# Altium PCB CBpcisionamento.PcbDoc
Units mm, origin at the board's own origin, x right, y up, seen from the top; angles counter-clockwise.
Board outline 96.12 x 102.87 mm, 2 copper layers (Top Layer, Bottom Layer); 6 components, 0 nets, 88 pads, 0 vias.
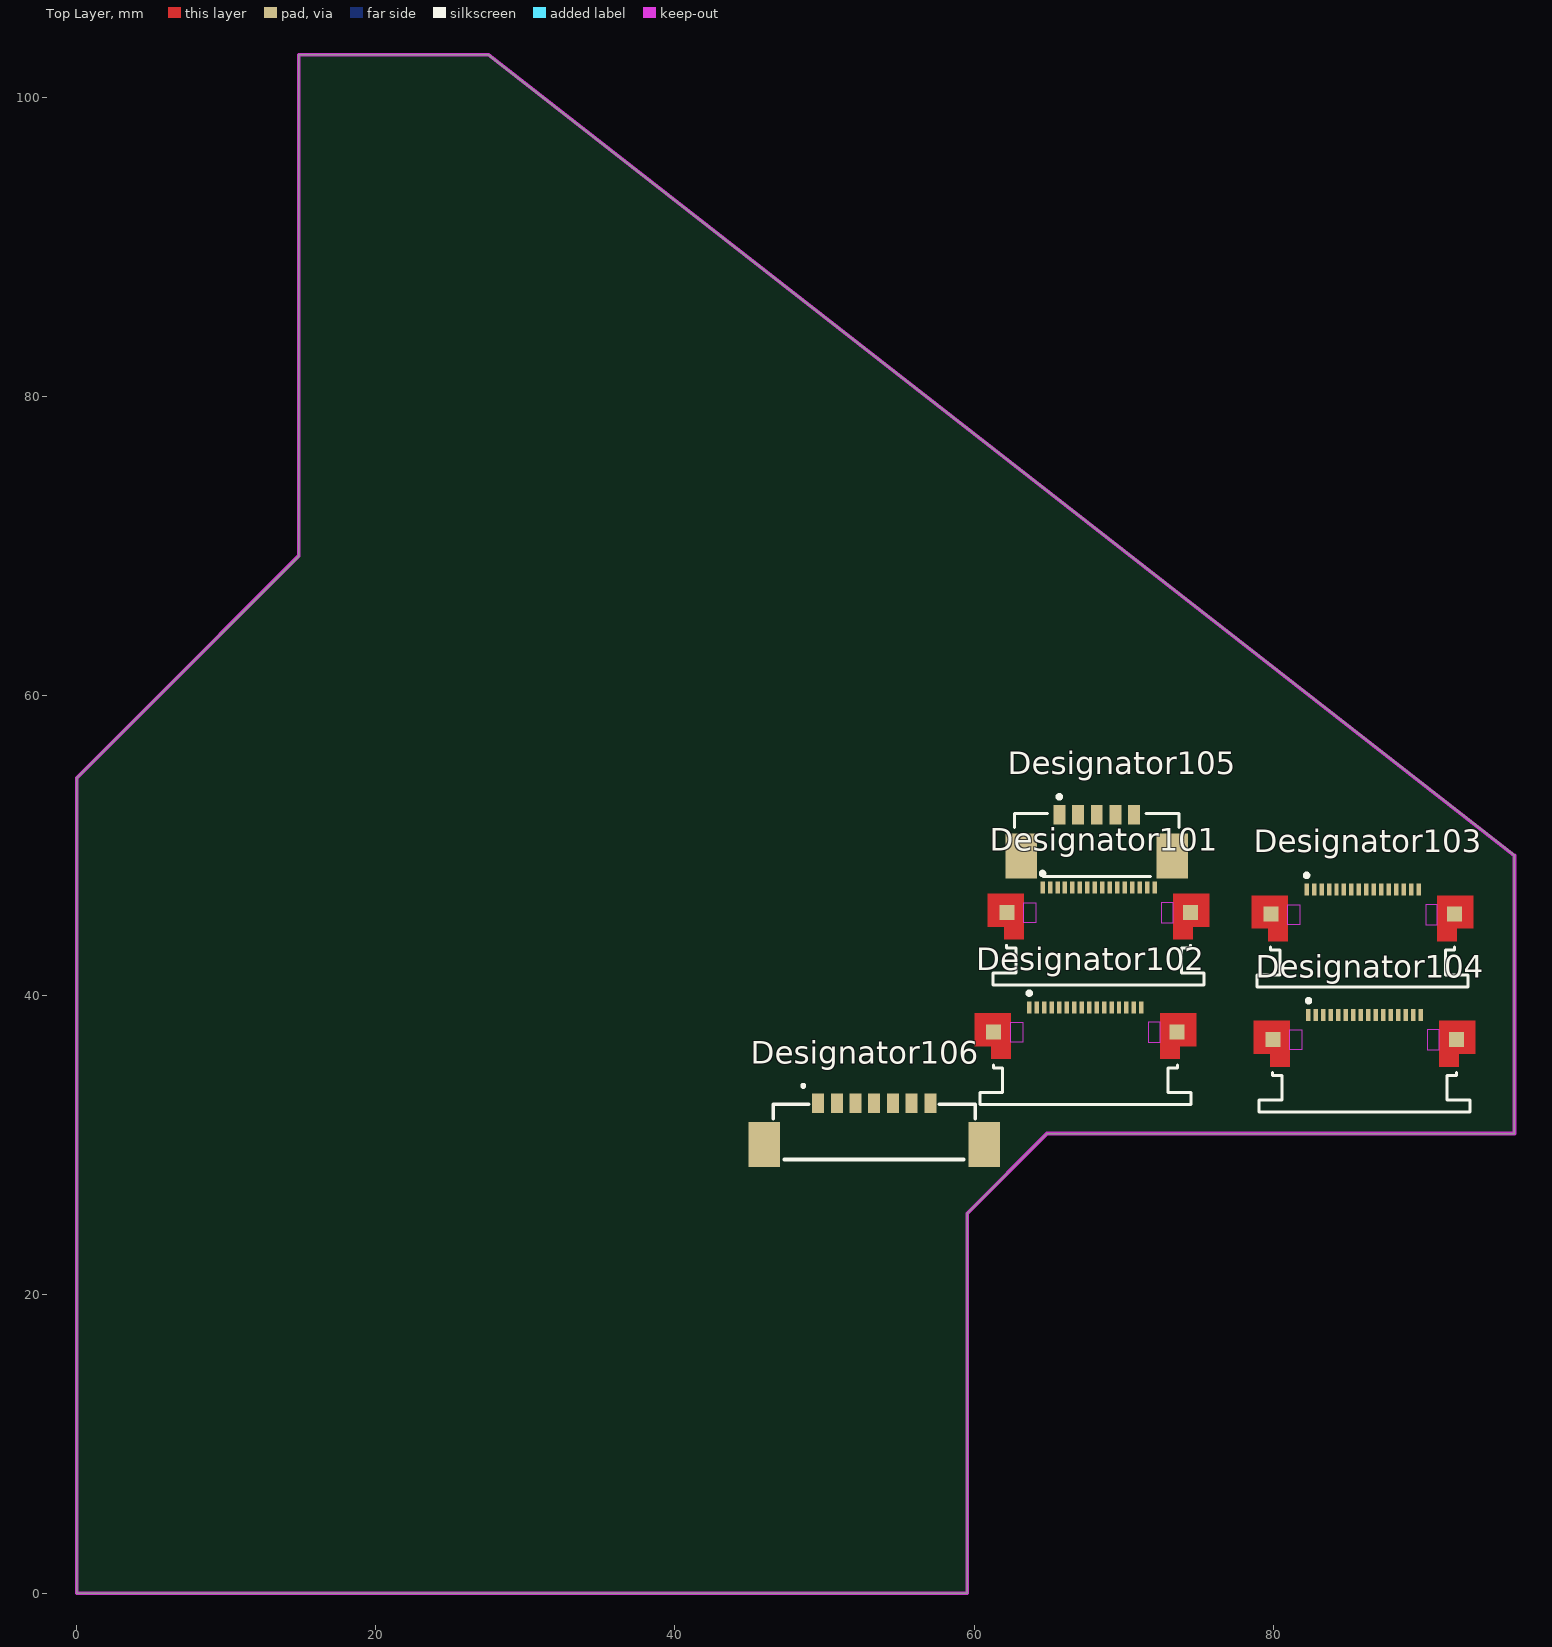
[diagram p0: Top Layer view]
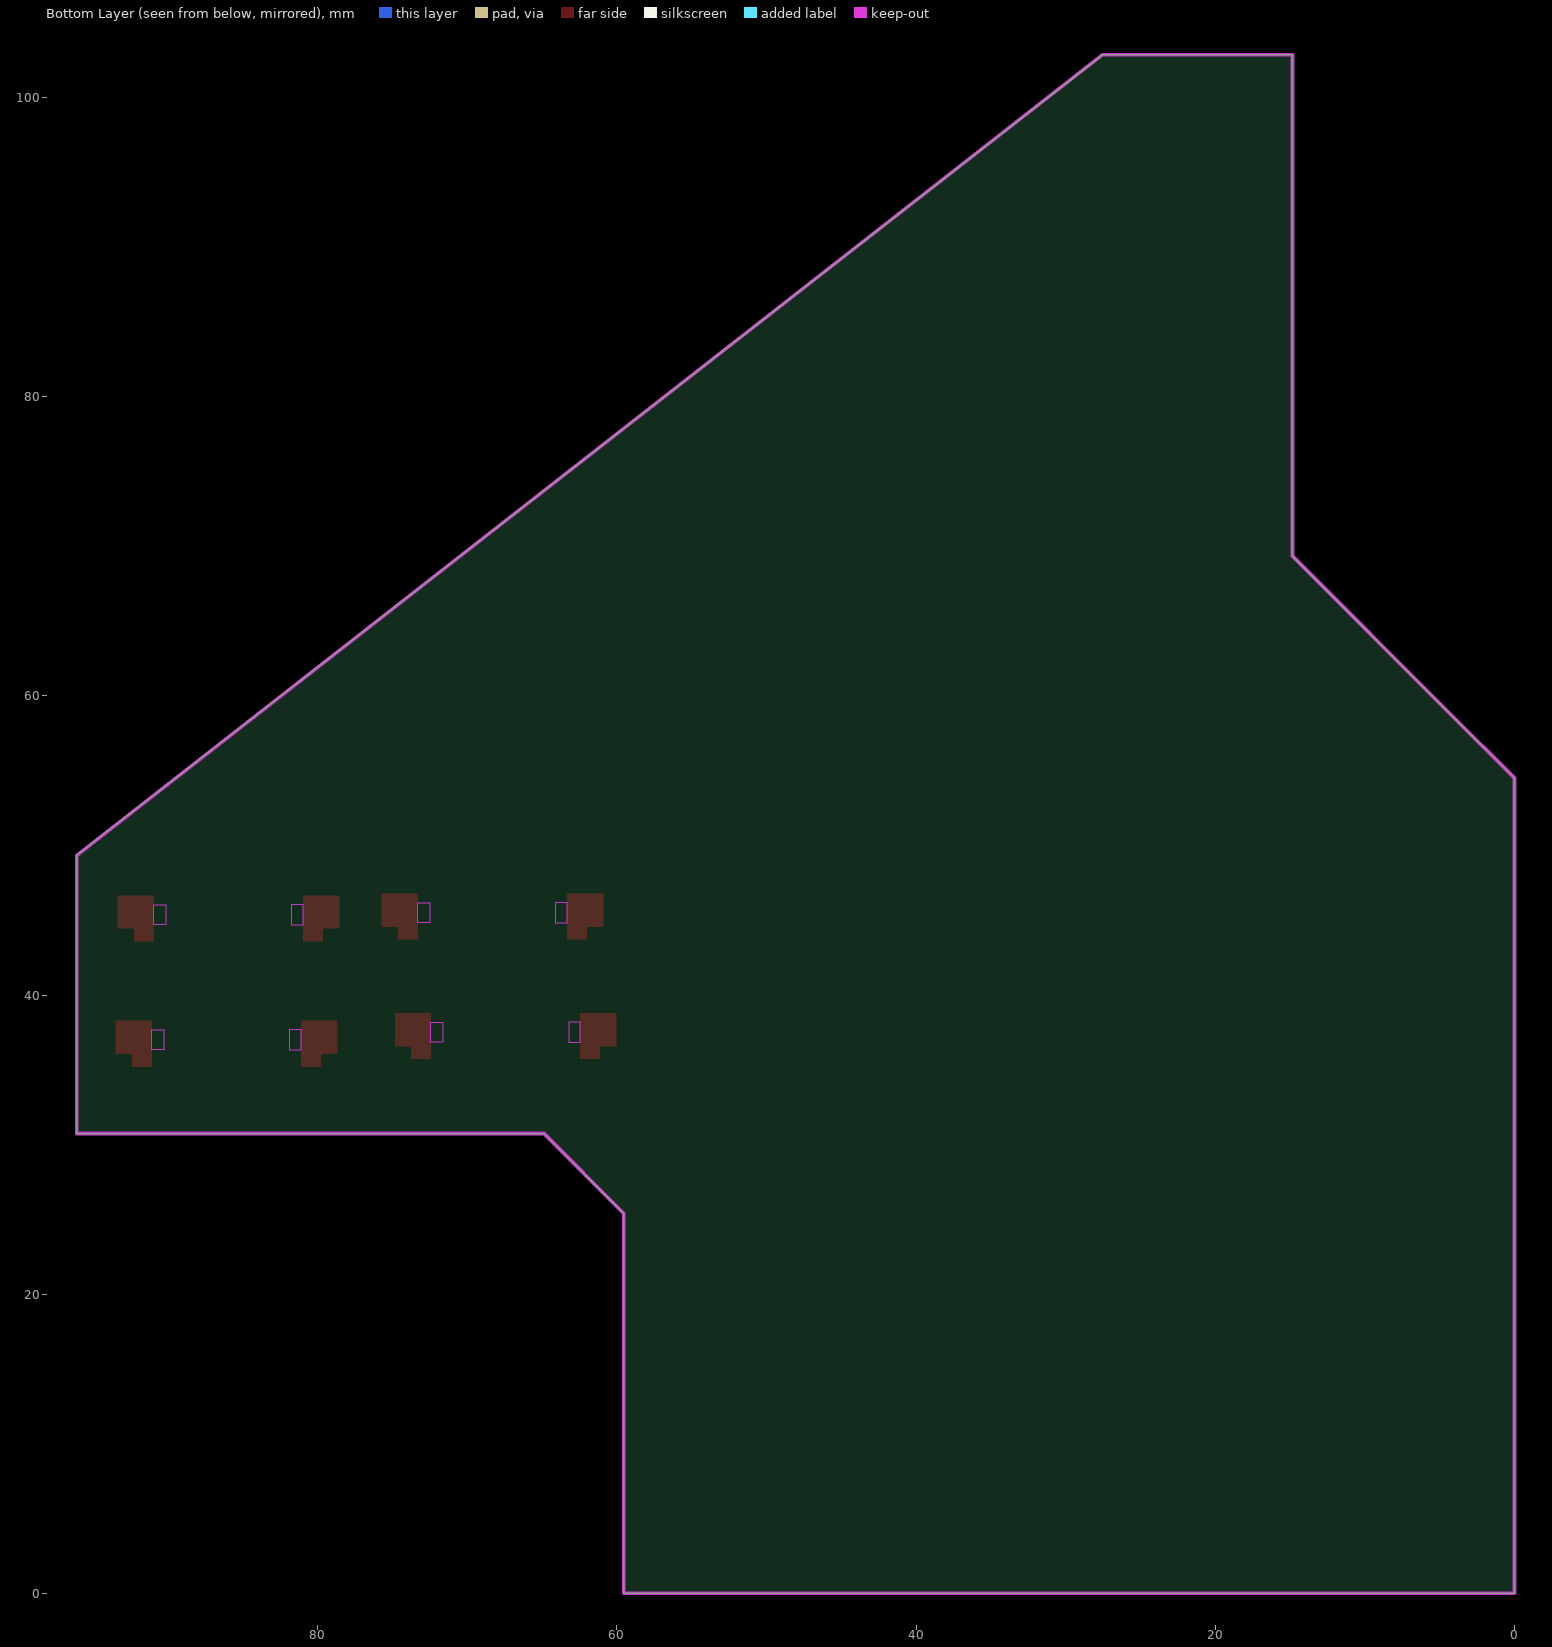
[diagram p1: Bottom Layer view, seen from below]

## Layer stack, top to bottom
Top Solder: solder mask 0.0102, Solder Resist, Dk 3.5
Top Layer: signal copper 0.0356
Dielectric 1: dielectric 0.32, FR-4, Dk 4.8
Bottom Layer: signal copper 0.0356
Bottom Solder: solder mask 0.0102, Solder Resist, Dk 3.5

## Board outline
0,0 0,54.501 4.3,58.801 14.841,69.342 14.841,102.87 27.519,102.87 96.121,49.342 96.121,30.734 64.879,30.734 59.545,25.4 59.545,0

## Design rules (kind name [scope] priority, off if disabled: settings)
Clearance [All] p1: gap=0.254 ignorepadtopadclearanceinfootprint=FALSE except(0: Arc-Hole Track-Hole SMDPad-Hole THPad-Hole Via-Hole Fill-Hole Poly-Hole Region-Hole Text-Hole)
PolygonConnect [All] p1: connectstyle=Relief reliefconductorwidth=0.254 reliefentries=4 polygonreliefangle="90 Angle" airgapwidth=0.254
RoutingVias [All] p1: holewidth=0.711 width=1.27 viastyle="Through Hole" minholewidth=0.711 minwidth=1.27 maxholewidth=0.711 maxwidth=1.27
SolderMaskExpansion [All] p1: expansion=0.102
Width [All] p1: maxlimit=0.254 minlimit=0.254 preferedwidth=0.254
30 further rules are at their usual default settings.

## Components (designator, comment, footprint, x,y, rotation, side; value= is the part's Value field where it differs from the comment)
Designator101 "Comment" MOLX-52746-1671 68.326,46.355 r0 top
Designator102 "Comment" MOLX-52746-1671 67.437,38.354 r0 top
Designator103 "Comment" MOLX-52746-1671 85.979,46.228 r0 top
Designator104 "Comment" MOLX-52746-1671 86.106,37.846 r0 top
Designator105 "Comment" MOLX-53398-0571-5_V 68.199,50.673 r0 top
Designator106 "Comment" 53398-0771 46.57,32.698 r0 top

## Footprints (in the part's own frame and the unit in brackets; to place one, negate y for a bottom-side part, rotate by r counter-clockwise, add the part's x,y. Pads: shape width x height; smd on the part's side, far side on the other; paste and mask are expansions set on the pad)
53398-0771 [mm]
  rect 0.8x1.3 smd: 1(3,0.068) 2(4.25,0.068) 3(5.5,0.068) 4(6.75,0.068) 5(8,0.068) 6(9.25,0.068) 7(10.5,0.068)
  rect 2.1x3 smd: 8(-0.6,-2.682) 9(14.1,-2.682)
  silkscreen extent 0,-3.7 13.5,1.3, body extent -0.22,-3.68 13.68,0.52, height 4.46
MOLX-52746-1671 [mm] "FPC Connector, 16-Leads, Right Angle, Pitch 0.5 mm, Mated Height 2.0 mm, SMT"
  rect 0.3x0.8 smd: 1(-3.75,0.824) 2(-3.25,0.824) 3(-2.75,0.824) 4(-2.25,0.824) 5(-1.75,0.824) 6(-1.25,0.824) 7(-0.75,0.824) 8(-0.25,0.824) 9(0.25,0.824) 10(0.75,0.824) 11(1.25,0.824) 12(1.75,0.824) 13(2.25,0.824) 14(2.75,0.824) 15(3.25,0.824) 16(3.75,0.824)
  rect 1x1 smd: MP1(-6.134,-0.824) MP2(6.134,-0.824)
  Top Layer region: 5,0.424 7.4,0.424 7.4,-1.776 7.4,-1.777 6.3,-1.777 6.3,-2.626 5,-2.626 5,0.424
  Top Layer region: -7.4,0.424 -5,0.424 -5,-2.626 -5,-2.626 -6.3,-2.626 -6.3,-1.777 -6.3,-1.776 -7.4,-1.776
  Keep-Out Layer region: 5,-0.176 4.2,-0.176 4.2,-1.516 5,-1.516
  Keep-Out Layer region: -5,-0.176 -4.2,-0.176 -4.2,-1.516 -5,-1.516
  silkscreen extent -7.05,-5.68 7.05,1.9, body extent -7.05,-5.68 7.05,0.92, height 2.01
MOLX-53398-0571-5_V [mm] "CONN, 5-Leads, Body 11x4.2mm, Pitch 1.25mm"
  rect 0.8x1.3 smd: 1(-2.5,1.375) 2(-1.25,1.375) 3(0,1.375) 4(1.25,1.375) 5(2.5,1.375)
  rect 2.1x3 smd: MP1(-5.05,-1.375) MP2(5.05,-1.375)
  silkscreen extent -5.5,-2.75 5.5,2.7, body extent -5.7,-2.75 5.7,1.45, height 4.7

## Nets (pads, with @x,y where several pads share a name; then routed paths per layer and width w, separated by ;. In a path a pad name is that pad's centre, name@x,y a point inside that pad or via, vN(x,y) a via of type N, cw(c..) or ccw(c..) an arc to the next point about the centre after c; other vN are vias at no path point)
pads on no net: Designator101.1 Designator101.2 Designator101.3 Designator101.4 Designator101.5 Designator101.6 Designator101.7 Designator101.8 Designator101.9 Designator101.10 Designator101.11 Designator101.12 Designator101.13 Designator101.14 Designator101.15 Designator101.16 Designator101.MP1 Designator101.MP2 Designator102.1 Designator102.2 Designator102.3 Designator102.4 Designator102.5 Designator102.6 Designator102.7 Designator102.8 Designator102.9 Designator102.10 Designator102.11 Designator102.12 Designator102.13 Designator102.14 Designator102.15 Designator102.16 Designator102.MP1 Designator102.MP2 Designator103.1 Designator103.2 Designator103.3 Designator103.4 Designator103.5 Designator103.6 Designator103.7 Designator103.8 Designator103.9 Designator103.10 Designator103.11 Designator103.12 Designator103.13 Designator103.14 Designator103.15 Designator103.16 Designator103.MP1 Designator103.MP2 Designator104.1 Designator104.2 Designator104.3 Designator104.4 Designator104.5 Designator104.6 Designator104.7 Designator104.8 Designator104.9 Designator104.10 Designator104.11 Designator104.12 Designator104.13 Designator104.14 Designator104.15 Designator104.16 Designator104.MP1 Designator104.MP2 Designator105.1 Designator105.2 Designator105.3 Designator105.4 Designator105.5 Designator105.MP1 Designator105.MP2 Designator106.1 Designator106.2 Designator106.3 Designator106.4 Designator106.5 Designator106.6 Designator106.7 Designator106.8 Designator106.9

## Keep-outs
Keep-Out Layer:
  lines w0.254: 0,54.5 0,0 59.545,0 59.545,25.4 64.879,30.734 67.673,30.734 78.087,30.734 96.121,30.734 96.121,49.342 27.519,102.87 14.841,102.87 14.841,69.342 4.3,58.801 ; 0,54.501 4.3,58.801 ; 4.3,58.801 4.3,58.801